# Altium PCB mpll31.PcbDoc (part 4 of 4)
Units mil, origin at the board's own origin, x right, y up, seen from the top; angles counter-clockwise.
Board outline 3925 x 3925 mil, 2 copper layers (TopLayer, BottomLayer); 92 components, 107 nets, 905 pads, 24 vias.
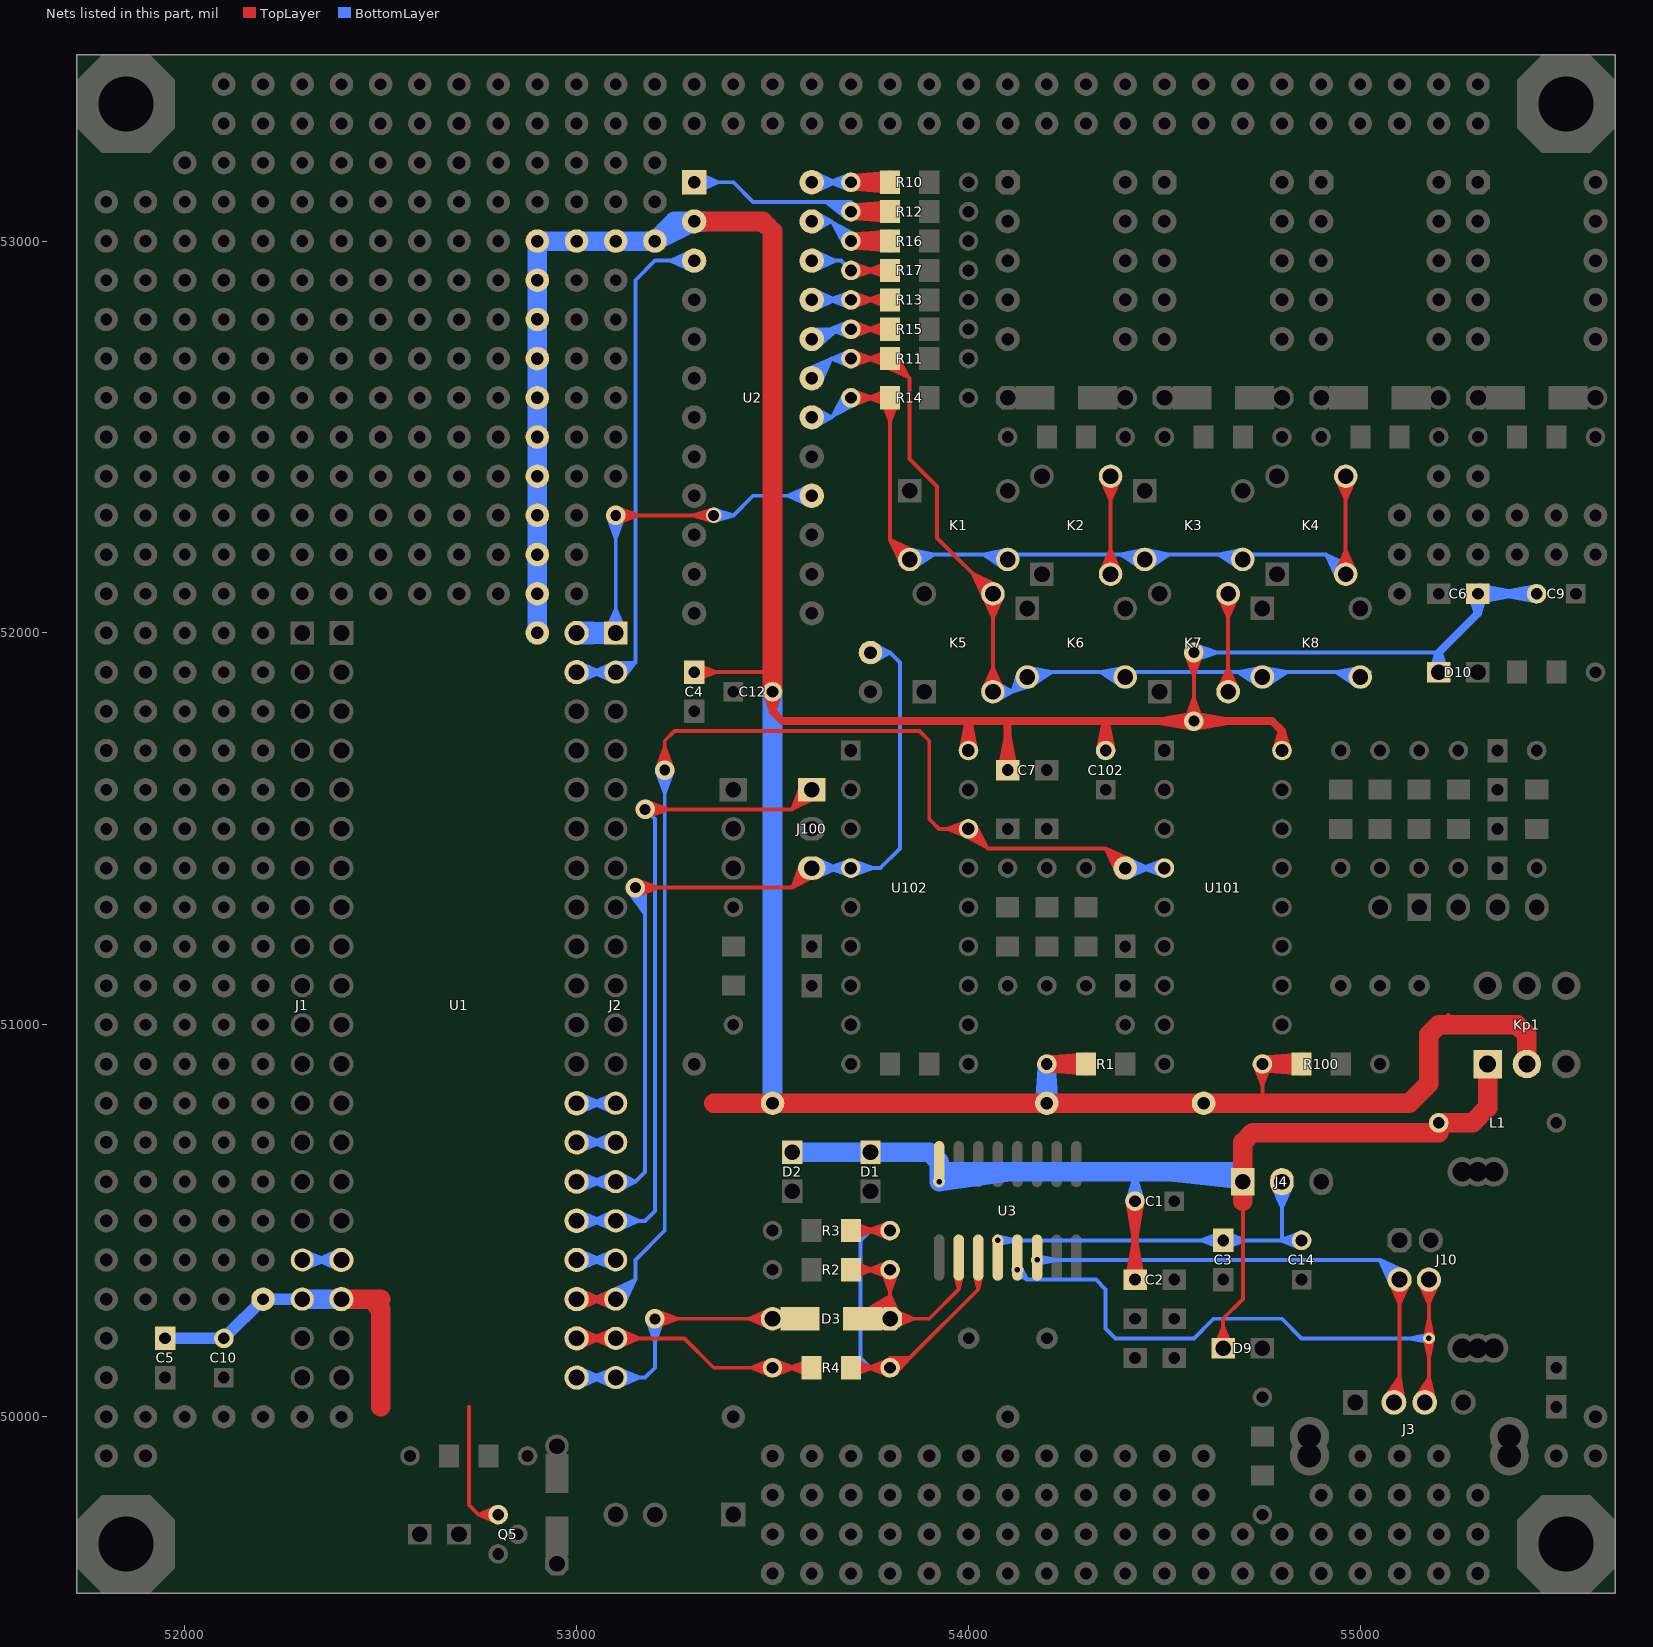
[diagram p4: the nets of this part, all layers, seen from the top]

## Via types
v1: diameter 50, hole 28, TopLayer to BottomLayer, 12 vias
v2: diameter 30, hole 14, TopLayer to BottomLayer, 8 vias
v3: diameter 40, hole 28, TopLayer to BottomLayer, 4 vias

## Nets (pads, with @x,y where several pads share a name; then routed paths per layer and width w, separated by ;. In a path a pad name is that pad's centre, name@x,y a point inside that pad or via, vN(x,y) a via of type N, cw(c..) or ccw(c..) an arc to the next point about the centre after c; other vN are vias at no path point) (continued)
P27: J2.2 U1.39 U2.3 | length 2530.7
  BottomLayer w10: U1.39@53000,51900 J2.2@53100,51900 53150,51925 ; U1.39@53000.3,51894.01 53061,51900 ; U1.39@53000.3,51905.99 53061,51900 ; U1.39@53002.1,51884.14 53061,51900 ; U1.39@53002.1,51915.86 53061,51900 ; U1.39@53005.54,51874.6 53061,51900 ; U1.39@53005.54,51925.4 53061,51900 ; J2.2@53094.11,51923.81 53150,51925 ; J2.2@53094.95,51876 53040.47,51900 ; J2.2@53094.95,51924 53040.47,51900 ; J2.2@53095.25,51913.73 53150,51925 ; J2.2@53098.23,51885.58 53040.47,51900 ; J2.2@53098.23,51914.42 53040.47,51900 ; J2.2@53108.13,51887.96 53150,51925 ; J2.2@53115.51,51881 53150,51925 ; J2.2@53125,51900 53150,51925 ; U2.3@53294.46,52924.6 53239,52950 ; U2.3@53294.46,52975.4 53239,52950 ; U2.3@53297.9,52934.14 53239,52950 ; U2.3@53297.9,52965.86 53239,52950 ; U2.3@53299.7,52944.01 53239,52950 ; U2.3@53299.7,52955.99 53239,52950 ; U2.3@53300,52950 53200,52950 53150,52900 53150,51925
P32: J2.18 pad.7@54400,51400 U1.23 U101.4 U102.14 | length 6470.6
  TopLayer w10: U1.23@53000,50300 J2.18@53100,50300 ; U1.23@53000.3,50294.01 53061,50300 ; U1.23@53000.3,50305.99 53061,50300 ; U1.23@53002.1,50284.14 53061,50300 ; U1.23@53002.1,50315.86 53061,50300 ; U1.23@53005.54,50274.6 53061,50300 ; U1.23@53005.54,50325.4 53061,50300 ; J2.18@53094.95,50276 53040.47,50300 ; J2.18@53094.95,50324 53040.47,50300 ; J2.18@53098.23,50285.58 53040.47,50300 ; J2.18@53098.23,50314.42 53040.47,50300 ; v1@53205.29,51653.39 53225,51709 ; v1@53215.04,51650.85 53225,51709 ; v1(53225,51650) 53225,51725 53250,51750 53875,51750 53900,51725 53900,51525 53925,51500 U102.14@54000,51500 54050,51450 54350,51450 ; v1@53234.96,51650.85 53225,51709 ; v1@53244.71,51653.39 53225,51709 ; U102.14@53988.19,51483.86 54046.21,51453.79 ; U102.14@53993.49,51492.41 54046.21,51453.79 ; U102.14@53996.36,51480.33 53945,51500 ; U102.14@53996.36,51519.67 53945,51500 ; U102.14@53999.09,51490.04 53945,51500 ; U102.14@53999.09,51509.96 53945,51500 ; U102.14@54007.59,51506.51 54046.21,51453.79 ; U102.14@54016.14,51511.81 54046.21,51453.79 ; pad.7@54379.48,51385.73 54350,51450 ; pad.7@54388.33,51390.58 54350,51450 ; pad.7@54400,51400 54350,51450 ; pad.7@54409.42,51411.67 54350,51450 ; pad.7@54414.27,51420.52 54350,51450
  BottomLayer w10: U1.23@53000,50300 J2.18@53100,50300 53150,50350 ; U1.23@53000.3,50294.01 53061,50300 ; U1.23@53000.3,50305.99 53061,50300 ; U1.23@53002.1,50284.14 53061,50300 ; U1.23@53002.1,50315.86 53061,50300 ; U1.23@53005.54,50274.6 53061,50300 ; U1.23@53005.54,50325.4 53061,50300 ; J2.18@53085.93,50320.09 53150,50350 ; J2.18@53090.84,50311.27 53150,50350 ; J2.18@53094.95,50276 53040.47,50300 ; J2.18@53094.95,50324 53040.47,50300 ; J2.18@53098.23,50285.58 53040.47,50300 ; J2.18@53098.23,50314.42 53040.47,50300 ; J2.18@53111.27,50290.84 53150,50350 ; J2.18@53120.09,50285.93 53150,50350 ; v1@53205.29,51646.61 53225,51591 ; v1@53215.04,51649.15 53225,51591 ; v1@53234.96,51649.15 53225,51591 ; v1@53244.71,51646.61 53225,51591 ; pad.7@54400,51400 U101.4@54500,51400 ; pad.7@54401.88,51385.12 54460,51400 ; pad.7@54401.88,51414.88 54460,51400 ; pad.7@54405.21,51375.55 54460,51400 ; pad.7@54405.21,51424.45 54460,51400 ; U101.4@54496.36,51380.33 54445,51400 ; U101.4@54496.36,51419.67 54445,51400 ; U101.4@54499.09,51390.04 54445,51400 ; U101.4@54499.09,51409.96 54445,51400 ; 53150,50350 53150,50400 53225,50475 v1(53225,51650) 53225,51591
P33: J2.17 U1.24 | length 704.1
  BottomLayer w10: U1.24@53000,50400 J2.17@53100,50400 ; U1.24@53000.3,50394.01 53061,50400 ; U1.24@53000.3,50405.99 53061,50400 ; U1.24@53002.1,50384.14 53061,50400 ; U1.24@53002.1,50415.86 53061,50400 ; U1.24@53005.54,50374.6 53061,50400 ; U1.24@53005.54,50425.4 53061,50400 ; J2.17@53094.95,50376 53040.47,50400 ; J2.17@53094.95,50424 53040.47,50400 ; J2.17@53098.23,50385.58 53040.47,50400 ; J2.17@53098.23,50414.42 53040.47,50400
P34: J2.16 J100.1 U1.25 | length 3106
  TopLayer w10: v1(53175,51550) 53550,51550 ; v1@53175.85,51540.04 53234,51550 ; v1@53175.85,51559.96 53234,51550 ; v1@53178.39,51530.29 53234,51550 ; v1@53178.39,51569.71 53234,51550 ; J100.1@53573.63,51612.98 53550,51550 ; J100.1@53582.8,51608.73 53550,51550 ; J100.1@53595,51600 53550,51550 ; J100.1@53600,51600 53550,51550 ; J100.1@53604.96,51588.79 53550,51550 ; J100.1@53610.15,51580.11 53550,51550
  BottomLayer w10: U1.25@53000,50500 J2.16@53100,50500 53175,50500 53200,50525 53200,51525 v1(53175,51550) ; U1.25@53000.3,50494.01 53061,50500 ; U1.25@53000.3,50505.99 53061,50500 ; U1.25@53002.1,50484.14 53061,50500 ; U1.25@53002.1,50515.86 53061,50500 ; U1.25@53005.54,50474.6 53061,50500 ; U1.25@53005.54,50525.4 53061,50500 ; J2.16@53094.95,50476 53040.47,50500 ; J2.16@53094.95,50524 53040.47,50500 ; J2.16@53098.23,50485.58 53040.47,50500 ; J2.16@53098.23,50514.42 53040.47,50500 ; J2.16@53101.77,50485.58 53159.53,50500 ; J2.16@53101.77,50514.42 53159.53,50500 ; J2.16@53105.05,50476 53159.53,50500 ; J2.16@53105.05,50524 53159.53,50500
P35: J2.15 J100.3 pad.5@53750,51950 U1.26 U102.4 | length 4864.2
  TopLayer w10: v1(53150,51350) 53550,51350 ; v1@53150.85,51340.04 53209,51350 ; v1@53150.85,51359.96 53209,51350 ; v1@53153.39,51330.29 53209,51350 ; v1@53153.39,51369.71 53209,51350 ; J100.3@53573.63,51412.98 53550,51350 ; J100.3@53582.8,51408.73 53550,51350 ; J100.3@53595,51400 53550,51350 ; J100.3@53600,51400 53550,51350 ; J100.3@53604.96,51388.79 53550,51350 ; J100.3@53610.15,51380.11 53550,51350
  BottomLayer w10: U1.26@53000,50600 J2.15@53100,50600 53150,50600 ; U1.26@53000.3,50594.01 53061,50600 ; U1.26@53000.3,50605.99 53061,50600 ; U1.26@53002.1,50584.14 53061,50600 ; U1.26@53002.1,50615.86 53061,50600 ; U1.26@53005.54,50574.6 53061,50600 ; U1.26@53005.54,50625.4 53061,50600 ; J2.15@53094.95,50576 53040.47,50600 ; J2.15@53094.95,50624 53040.47,50600 ; J2.15@53098.23,50585.58 53040.47,50600 ; J2.15@53098.23,50614.42 53040.47,50600 ; J2.15@53102.11,50585.63 53150,50600 ; J2.15@53102.11,50614.37 53150,50600 ; J2.15@53106.02,50576.22 53150,50600 ; J2.15@53106.02,50623.78 53150,50600 ; v1@53132.38,51340.53 53175,51282.36 ; v1@53140.88,51345.89 53175,51282.36 ; v1(53150,51350) 53175,51282.36 ; v1@53159.6,51352.81 53175,51282.36 ; v1@53169.54,51354.26 53175,51282.36 ; 53175,51350 53175,50625 53150,50600 ; J100.3@53600,51400 U102.4@53700,51400 53775,51400 53825,51450 53825,51925 53800,51950 ; J100.3@53605,51400 53665,51400 ; J100.3@53606.88,51385.12 53665,51400 ; J100.3@53606.88,51414.88 53665,51400 ; J100.3@53610.21,51375.55 53665,51400 ; J100.3@53610.21,51424.45 53665,51400 ; U102.4@53696.36,51380.33 53645,51400 ; U102.4@53696.36,51419.67 53645,51400 ; U102.4@53699.09,51390.04 53645,51400 ; U102.4@53699.09,51409.96 53645,51400 ; U102.4@53700.91,51390.04 53755,51400 ; U102.4@53700.91,51409.96 53755,51400 ; U102.4@53703.64,51380.33 53755,51400 ; U102.4@53703.64,51419.67 53755,51400 ; pad.5@53750,51950 53800,51950 ; pad.5@53752.25,51935.17 53800,51950 ; pad.5@53752.25,51964.83 53800,51950 ; pad.5@53756.25,51925.79 53800,51950 ; pad.5@53756.25,51974.21 53800,51950
P36: J2.14 U1.27 | length 704.1
  BottomLayer w10: U1.27@53000,50700 J2.14@53100,50700 ; U1.27@53000.3,50694.01 53061,50700 ; U1.27@53000.3,50705.99 53061,50700 ; U1.27@53002.1,50684.14 53061,50700 ; U1.27@53002.1,50715.86 53061,50700 ; U1.27@53005.54,50674.6 53061,50700 ; U1.27@53005.54,50725.4 53061,50700 ; J2.14@53094.95,50676 53040.47,50700 ; J2.14@53094.95,50724 53040.47,50700 ; J2.14@53098.23,50685.58 53040.47,50700 ; J2.14@53098.23,50714.42 53040.47,50700
P37: J2.13 U1.28 | length 704.1
  BottomLayer w10: U1.28@53000,50800 J2.13@53100,50800 ; U1.28@53000.3,50794.01 53061,50800 ; U1.28@53000.3,50805.99 53061,50800 ; U1.28@53002.1,50784.14 53061,50800 ; U1.28@53002.1,50815.86 53061,50800 ; U1.28@53005.54,50774.6 53061,50800 ; U1.28@53005.54,50825.4 53061,50800 ; J2.13@53094.95,50776 53040.47,50800 ; J2.13@53094.95,50824 53040.47,50800 ; J2.13@53098.23,50785.58 53040.47,50800 ; J2.13@53098.23,50814.42 53040.47,50800
P45: J2.1 U1.40 U2.16 | length 3170
  TopLayer w10: v1(53100,52300) v3(53350,52300) 53296,52300 ; v1@53100.85,52290.04 53159,52300 ; v1@53100.85,52309.96 53159,52300 ; v1@53103.39,52280.29 53159,52300 ; v1@53103.39,52319.71 53159,52300 ; v3@53347.92,52285.15 53296,52300 ; v3@53347.92,52314.85 53296,52300
  BottomLayer w10: J2.1@53076,52005.05 53100,52059.53 ; v1@53080.29,52296.61 53100,52241 ; J2.1@53085.58,52001.77 53100,52059.53 ; v1@53090.04,52299.15 53100,52241 ; J2.1@53100,52000 v1(53100,52300) ; v1@53109.96,52299.15 53100,52241 ; J2.1@53114.42,52001.77 53100,52059.53 ; v1@53119.71,52296.61 53100,52241 ; J2.1@53124,52005.05 53100,52059.53 ; v3(53350,52300) 53400,52300 ; v3@53352.25,52285.17 53400,52300 ; v3@53352.25,52314.83 53400,52300 ; U2.16@53594.46,52324.6 53539,52350 ; U2.16@53594.46,52375.4 53539,52350 ; U2.16@53597.9,52334.14 53539,52350 ; U2.16@53597.9,52365.86 53539,52350 ; U2.16@53599.7,52344.01 53539,52350 ; U2.16@53599.7,52355.99 53539,52350 ; U2.16@53600,52350 53450,52350 53400,52300
  BottomLayer w20: U1.40@52998.34,51979.07 J2.1@53089.96,51982.35 ; U1.40@52998.34,52020.93 J2.1@53089.96,52017.65 ; U1.40@53002.42,51979.14 53091,52000 U1.40@53002.42,52020.86 ; U1.40@53006.38,51979.99 J2.1@53089.96,52017.65 ; U1.40@53006.38,52020.01 J2.1@53089.96,51982.35 ; J2.1@53097.87,51980.59 53010.47,52000 J2.1@53097.87,52019.41 ; J2.1@53100,52000 U1.40@53000,52000 ; U1.40@53000,52000 J2.1@53089.96,52017.65 ; U1.40@53000,52000 J2.1@53089.96,51982.35
P54: J1.17 U1.17 | length 704.1
  BottomLayer w10: J1.17@52300,50400 U1.17@52400,50400 ; J1.17@52301.77,50385.58 52359.53,50400 ; J1.17@52301.77,50414.42 52359.53,50400 ; J1.17@52305.05,50376 52359.53,50400 ; J1.17@52305.05,50424 52359.53,50400 ; U1.17@52394.46,50374.6 52339,50400 ; U1.17@52394.46,50425.4 52339,50400 ; U1.17@52397.9,50384.14 52339,50400 ; U1.17@52397.9,50415.86 52339,50400 ; U1.17@52399.7,50394.01 52339,50400 ; U1.17@52399.7,50405.99 52339,50400
RX: D3.1 D3.3 R2.1 R2.3 U3.2 | length 3697.2
  TopLayer w10: R2.3@53700,50375 R2.1@53800,50375 D3.1@53800,50250 ; R2.3@53701.01,50364.46 53755.59,50375 ; R2.3@53701.01,50385.54 53755.59,50375 ; R2.3@53703.81,50354.77 53755.59,50375 ; R2.3@53703.81,50395.23 53755.59,50375 ; D3.3@53730,50250 D3.1@53800,50250 ; D3.3@53734.6,50268.7 53798.67,50307.02 ; D3.3@53740.34,50260.41 53798.67,50307.02 ; D3.3@53744.18,50226.29 D3.1@53794.79,50225.55 ; D3.3@53744.18,50273.71 D3.1@53794.79,50274.45 ; D3.3@53745.35,50236.4 D3.1@53794.79,50225.55 ; D3.3@53745.35,50263.6 D3.1@53794.79,50274.45 ; D3.3@53748.21,50235.65 D3.1@53798.12,50235.12 ; D3.3@53748.21,50264.35 D3.1@53798.12,50264.88 ; D3.3@53749.14,50225.51 D3.1@53798.12,50235.12 ; D3.3@53749.14,50274.49 D3.1@53798.12,50264.88 ; D3.3@53752.6,50235.63 D3.1@53800,50250 ; D3.3@53752.6,50264.37 D3.1@53800,50250 ; D3.3@53756.55,50226.24 D3.1@53800,50250 ; D3.3@53756.55,50273.76 D3.1@53800,50250 ; D3.3@53756.77,50236.91 D3.1@53798.12,50264.88 ; D3.3@53756.77,50263.09 D3.1@53798.12,50235.12 ; D3.3@53759.24,50238.42 D3.1@53794.79,50274.45 ; D3.3@53759.24,50261.58 D3.1@53794.79,50225.55 ; D3.3@53762.43,50241.75 53798.67,50307.02 ; D3.3@53763.31,50229.1 D3.1@53798.12,50264.88 ; D3.3@53763.31,50270.9 D3.1@53798.12,50235.12 ; D3.3@53767.17,50232.03 D3.1@53794.79,50274.45 ; D3.3@53767.17,50267.97 D3.1@53794.79,50225.55 ; D3.1@53771.55,50237.46 53798.67,50307.02 ; D3.1@53775.55,50255.21 53800,50310 ; R2.1@53780.33,50371.36 53800,50320 ; D3.1@53785.12,50251.88 53800,50310 ; R2.1@53790.04,50374.09 53800,50320 ; R2.1@53796.36,50355.33 53745,50375 ; R2.1@53796.36,50394.67 53745,50375 ; R2.1@53799.09,50365.04 53745,50375 ; R2.1@53799.09,50384.96 53745,50375 ; D3.1@53801.88,50235.12 53860,50250 ; D3.1@53801.88,50264.88 53860,50250 ; D3.1@53805.21,50225.55 53860,50250 ; D3.1@53805.21,50274.45 53860,50250 ; R2.1@53809.96,50374.09 53800,50320 ; D3.1@53814.88,50251.88 53800,50310 ; R2.1@53819.67,50371.36 53800,50320 ; D3.1@53824.45,50255.21 53800,50310 ; U3.2@53966.56,50359.48 53975,50325 ; U3.2@53975,50360.5 53975,50325 ; U3.2@53975,50406 53975,50325 ; U3.2@53983.44,50359.48 53975,50325 ; D3.3@53740,50250 D3.1@53798.12,50264.88 ; D3.3@53740,50250 D3.1@53798.12,50235.12 ; D3.3@53740,50250 D3.1@53794.79,50274.45 ; D3.3@53740,50250 D3.1@53794.79,50225.55 ; D3.3@53750.47,50250 D3.1@53798.12,50235.12 ; D3.3@53750.47,50250 D3.1@53798.12,50264.88 ; D3.3@53750.47,50250 D3.1@53800,50250 ; D3.3@53750.47,50250 D3.1@53794.79,50225.55 ; D3.3@53750.47,50250 D3.1@53794.79,50274.45 ; D3.3@53750.47,50250 53798.67,50307.02 ; D3.1@53800,50250 53900,50250 53975,50325
RXD: D3.2 D3.4 J2.20 U1.21 | length 2189.6
  TopLayer w10: v1(53200,50250) D3.2@53500,50250 ; v1@53200.85,50240.04 53259,50250 ; v1@53200.85,50259.96 53259,50250 ; v1@53203.39,50230.29 53259,50250 ; v1@53203.39,50269.71 53259,50250 ; D3.2@53494.79,50225.55 53440,50250 ; D3.2@53494.79,50274.45 53440,50250 ; D3.2@53498.12,50235.12 53440,50250 ; D3.2@53498.12,50264.88 53440,50250
  BottomLayer w10: U1.21@53000,50100 J2.20@53100,50100 53175,50100 53200,50125 v1(53200,50250) ; U1.21@53000.3,50094.01 53061,50100 ; U1.21@53000.3,50105.99 53061,50100 ; U1.21@53002.1,50084.14 53061,50100 ; U1.21@53002.1,50115.86 53061,50100 ; U1.21@53005.54,50074.6 53061,50100 ; U1.21@53005.54,50125.4 53061,50100 ; J2.20@53094.95,50076 53040.47,50100 ; J2.20@53094.95,50124 53040.47,50100 ; J2.20@53098.23,50085.58 53040.47,50100 ; J2.20@53098.23,50114.42 53040.47,50100 ; J2.20@53101.77,50085.58 53159.53,50100 ; J2.20@53101.77,50114.42 53159.53,50100 ; J2.20@53105.05,50076 53159.53,50100 ; J2.20@53105.05,50124 53159.53,50100 ; v1@53180.29,50246.61 53200,50191 ; v1@53190.04,50249.15 53200,50191 ; v1@53209.96,50249.15 53200,50191 ; v1@53219.71,50246.61 53200,50191
SEG0: K1.2 K1.3 K2.2 K2.3 K3.2 K3.3 K4.2 K4.3 R14.1 R14.3 U2.18 | length 7031.4
  TopLayer w10: R14.1@53700,52600 53775,52600 53800,52575 53800,52237.5 ; R14.1@53700.91,52590.04 53755,52600 ; R14.1@53700.91,52609.96 53755,52600 ; R14.1@53703.64,52580.33 53755,52600 ; R14.1@53703.64,52619.67 53755,52600 ; R14.3@53779.77,52592.25 53800,52540.47 ; R14.3@53789.46,52595.05 53800,52540.47 ; R14.3@53796.19,52579.77 53744.41,52600 ; R14.3@53796.19,52620.23 53744.41,52600 ; R14.3@53798.99,52589.46 53744.41,52600 ; R14.3@53798.99,52610.54 53744.41,52600 ; R14.3@53800,52596.06 53800,52540.47 ; R14.3@53800,52600 53744.41,52600 ; R14.3@53810.54,52595.05 53800,52540.47 ; R14.3@53820.23,52592.25 53800,52540.47 ; K1.2@53829.48,52173.23 53800,52237.5 ; K1.2@53838.33,52178.08 53800,52237.5 ; K1.2@53850,52187.5 53800,52237.5 ; K1.2@53859.42,52199.17 53800,52237.5 ; K1.2@53864.27,52208.02 53800,52237.5 ; K2.2@54338.05,52155.21 54362.5,52210 ; K2.3@54338.05,52394.79 54362.5,52340 ; K2.2@54347.62,52151.88 54362.5,52210 ; K2.3@54347.62,52398.12 54362.5,52340 ; K2.2@54362.5,52150 K2.3@54362.5,52400 ; K2.2@54377.38,52151.88 54362.5,52210 ; K2.3@54377.38,52398.12 54362.5,52340 ; K2.2@54386.95,52155.21 54362.5,52210 ; K2.3@54386.95,52394.79 54362.5,52340 ; K4.2@54938.05,52155.21 54962.5,52210 ; K4.3@54938.05,52394.79 54962.5,52340 ; K4.2@54947.62,52151.88 54962.5,52210 ; K4.3@54947.62,52398.12 54962.5,52340 ; K4.2@54962.5,52150 K4.3@54962.5,52400 ; K4.2@54977.38,52151.88 54962.5,52210 ; K4.3@54977.38,52398.12 54962.5,52340 ; K4.2@54986.95,52155.21 54962.5,52210 ; K4.3@54986.95,52394.79 54962.5,52340
  BottomLayer w10: U2.18@53600,52550 53650,52550 ; U2.18@53600.36,52544.01 53650,52550 ; U2.18@53600.36,52555.99 53650,52550 ; U2.18@53602.56,52534.21 53650,52550 ; U2.18@53602.56,52565.79 53650,52550 ; U2.18@53606.76,52524.89 53650,52550 ; U2.18@53606.76,52575.11 53650,52550 ; R14.1@53683.86,52611.81 53653.79,52553.79 ; R14.1@53692.41,52606.51 53653.79,52553.79 ; R14.1@53706.51,52592.41 53653.79,52553.79 ; R14.1@53711.81,52583.86 53653.79,52553.79 ; K1.2@53848.8,52202.45 53912.19,52200 ; K1.2@53850,52187.5 53912.19,52200 ; K1.2@53850,52200 54300,52200 54700,52200 54900,52200 54912.5,52200 ; K1.2@53850,52212.5 53912.19,52200 ; K1.2@53854.67,52173.25 53912.19,52200 ; K1.2@53859.66,52164.44 53912.19,52200 ; K1.3@54090.31,52164.46 54038.05,52200 ; K1.3@54095.31,52173.25 54038.05,52200 ; K1.3@54100,52187.5 54038.05,52200 ; K1.3@54100,52212.5 54038.05,52200 ; K1.3@54101.2,52202.45 54038.05,52200 ; K2.2@54338.29,52156.25 54362.5,52200 ; K2.2@54347.67,52152.25 54362.5,52200 ; K2.2@54362.5,52150 54362.5,52200 ; K2.2@54377.33,52152.25 54362.5,52200 ; K2.2@54386.71,52156.25 54362.5,52200 ; K3.2@54440.26,52164.48 54388.38,52200 ; K3.2@54445.29,52173.26 54388.38,52200 ; K3.2@54448.8,52202.45 54511.95,52200 ; K3.2@54451.21,52202.45 54388.38,52200 ; K3.2@54454.69,52173.25 54511.95,52200 ; K3.2@54459.69,52164.46 54511.95,52200 ; K3.3@54690.33,52164.44 54637.85,52200 ; K3.3@54695.32,52173.25 54637.85,52200 ; K3.3@54700,52187.5 54637.85,52200 ; K3.3@54700,52212.5 54637.85,52200 ; K3.3@54701.2,52202.45 54637.85,52200 ; K4.2@54941.98,52135.73 54912.5,52200 ; K4.2@54950.83,52140.58 54912.5,52200 ; K4.2@54962.5,52150 54912.5,52200 ; K4.2@54971.92,52161.67 54912.5,52200 ; K4.2@54976.77,52170.52 54912.5,52200 ; 53650,52550 R14.1@53700,52600 53653.79,52553.79 ; 54388.38,52200 K3.2@54450,52187.5 54511.95,52200 ; 54388.38,52200 54450,52212.5 54511.95,52200
SEG1: K5.2 K5.3 K6.2 K6.3 K7.2 K7.3 K8.2 K8.3 R11.1 R11.3 U2.19 | length 7428.1
  TopLayer w10: R11.1@53700,52700 R11.3@53800,52700 53850,52650 53850,52443.71 53920,52373.71 53920,52242.5 K5.3@54062.5,52100 ; R11.1@53700.91,52690.04 53755,52700 ; R11.1@53700.91,52709.96 53755,52700 ; R11.1@53703.64,52680.33 53755,52700 ; R11.1@53703.64,52719.67 53755,52700 ; R11.3@53788.74,52678.82 53846.8,52653.2 ; R11.3@53793.52,52687.68 53846.8,52653.2 ; R11.3@53796.19,52679.77 53744.41,52700 ; R11.3@53796.19,52720.23 53744.41,52700 ; R11.3@53798.99,52689.46 53744.41,52700 ; R11.3@53798.99,52710.54 53744.41,52700 ; R11.3@53800,52696.06 53846.8,52653.2 ; R11.3@53807.78,52703.25 53846.8,52653.2 ; R11.3@53816.19,52708.79 53846.8,52653.2 ; K5.2@54038.05,51855.21 54062.5,51910 ; K5.3@54038.05,52094.79 54062.5,52040 ; K5.3@54042.04,52085.64 54011.29,52151.21 ; K5.2@54047.62,51851.88 54062.5,51910 ; K5.3@54047.62,52098.12 54062.5,52040 ; K5.3@54050.85,52090.55 54011.29,52151.21 ; K5.2@54062.5,51850 K5.3@54062.5,52100 ; K5.3@54071.95,52111.65 54011.29,52151.21 ; K5.3@54076.86,52120.46 54011.29,52151.21 ; K5.2@54077.38,51851.88 54062.5,51910 ; K5.3@54077.38,52098.12 54062.5,52040 ; K5.2@54086.95,51855.21 54062.5,51910 ; K5.3@54086.95,52094.79 54062.5,52040 ; K7.2@54638.05,51855.21 54662.5,51910 ; K7.3@54638.05,52094.79 54662.5,52040 ; K7.2@54647.62,51851.88 54662.5,51910 ; K7.3@54647.62,52098.12 54662.5,52040 ; K7.2@54662.5,51850 K7.3@54662.5,52100 ; K7.2@54677.38,51851.88 54662.5,51910 ; K7.3@54677.38,52098.12 54662.5,52040 ; K7.2@54686.95,51855.21 54662.5,51910 ; K7.3@54686.95,52094.79 54662.5,52040 ; 54011.29,52151.21 K5.3@54062.5,52100
  BottomLayer w10: U2.19@53585.31,52671.45 53650,52700 ; U2.19@53590.04,52662.52 53650,52700 ; U2.19@53595.94,52654.42 53650,52700 ; U2.19@53600,52650 53650,52700 ; U2.19@53604.42,52645.94 53650,52700 ; U2.19@53612.52,52640.04 53650,52700 ; U2.19@53621.45,52635.31 53650,52700 ; R11.1@53696,52680.4 53650,52700 ; R11.1@53696,52719.6 53650,52700 ; R11.1@53699,52690.05 53650,52700 ; R11.1@53699,52709.95 53650,52700 ; K5.2@54062.5,51862.5 K5.2@54062.5,51850 54112.5,51850 ; K5.2@54064.75,51835.17 54112.5,51850 ; K5.2@54064.75,51864.83 54112.5,51850 ; K5.2@54068.75,51825.79 54112.5,51850 ; K5.2@54068.75,51874.21 54112.5,51850 ; K6.2@54128.65,51900.51 54112.5,51850 ; K6.2@54137.5,51900 K6.2@54150,51887.5 ; K6.2@54138,51896.5 54112.5,51850 ; K6.2@54148.8,51902.45 54211.95,51900 ; K6.2@54150,51900 54400,51900 54650,51900 54662.5,51900 ; K6.2@54150,51912.5 54211.95,51900 ; K6.2@54154.69,51873.25 54211.95,51900 ; K6.2@54159,51875.5 54112.5,51850 ; K6.2@54159.69,51864.46 54211.95,51900 ; K6.2@54163.01,51866.15 54112.5,51850 ; K6.3@54390.31,51864.46 54338.05,51900 ; K6.3@54395.31,51873.25 54338.05,51900 ; K6.3@54400,51887.5 54338.05,51900 ; K6.3@54400,51912.5 54338.05,51900 ; K6.3@54401.2,51902.45 54338.05,51900 ; K7.2@54638.29,51856.25 54662.5,51900 ; K7.2@54647.67,51852.25 54662.5,51900 ; K7.2@54662.5,51850 54662.5,51900 ; K7.2@54677.33,51852.25 54662.5,51900 ; K7.2@54686.71,51856.25 54662.5,51900 ; K8.2@54740.18,51864.51 54688.9,51900 ; K8.2@54745.25,51873.27 54688.9,51900 ; K8.2@54748.8,51902.45 54812,51900 ; K8.2@54751.22,51902.45 54688.9,51900 ; K8.2@54754.69,51873.25 54812,51900 ; K8.2@54759.69,51864.45 54812,51900 ; K8.3@54990.19,51864.5 54938.83,51900 ; K8.3@54995.25,51873.27 54938.83,51900 ; K8.3@55000,51887.5 54938.83,51900 ; K8.3@55000,51912.5 54938.83,51900 ; K8.3@55001.22,51902.45 54938.83,51900 ; K8.3@55025,51900 54662.5,51900 ; 53650,52700 R11.1@53700,52700 53650,52700 ; 54112.5,51850 K6.2@54150,51887.5 ; K6.2@54150,51887.5 54211.95,51900 ; 54688.9,51900 K8.2@54750,51887.5 54812,51900 ; 54688.9,51900 54750,51912.5 54812,51900
SEG2: R15.1 R15.3 U2.20 | length 1388.3
  TopLayer w10: R15.1@53700,52775 R15.3@53800,52775 ; R15.1@53700.91,52765.04 53755,52775 ; R15.1@53700.91,52784.96 53755,52775 ; R15.1@53703.64,52755.33 53755,52775 ; R15.1@53703.64,52794.67 53755,52775 ; R15.3@53796.19,52754.77 53744.41,52775 ; R15.3@53796.19,52795.23 53744.41,52775 ; R15.3@53798.99,52764.46 53744.41,52775 ; R15.3@53798.99,52785.54 53744.41,52775
  BottomLayer w10: U2.20@53595.39,52775.59 53665.48,52775 ; U2.20@53596.04,52765.5 53665.48,52775 ; U2.20@53598.1,52755.69 53665.48,52775 ; U2.20@53600,52775 R15.1@53700,52775 ; U2.20@53602.38,52744.49 53665.48,52775 ; U2.20@53607.38,52735.8 53665.48,52775 ; U2.20@53613.62,52727.85 53665.48,52775 ; 53625,52775 U2.20@53600,52750 53665.48,52775 ; R15.1@53696.36,52755.33 53645,52775 ; R15.1@53696.36,52794.67 53645,52775 ; R15.1@53699.09,52765.04 53645,52775 ; R15.1@53699.09,52784.96 53645,52775
SEG3: R13.1 R13.3 U2.21 | length 1228.4
  TopLayer w10: R13.1@53700,52850 R13.3@53800,52850 ; R13.1@53700.91,52840.04 53755,52850 ; R13.1@53700.91,52859.96 53755,52850 ; R13.1@53703.64,52830.33 53755,52850 ; R13.1@53703.64,52869.67 53755,52850 ; R13.3@53796.19,52829.77 53744.41,52850 ; R13.3@53796.19,52870.23 53744.41,52850 ; R13.3@53798.99,52839.46 53744.41,52850 ; R13.3@53798.99,52860.54 53744.41,52850
  BottomLayer w10: U2.21@53600,52850 R13.1@53700,52850 ; U2.21@53600.3,52844.01 53661,52850 ; U2.21@53600.3,52855.99 53661,52850 ; U2.21@53602.1,52834.14 53661,52850 ; U2.21@53602.1,52865.86 53661,52850 ; U2.21@53605.54,52824.6 53661,52850 ; U2.21@53605.54,52875.4 53661,52850 ; R13.1@53696.36,52830.33 53645,52850 ; R13.1@53696.36,52869.67 53645,52850 ; R13.1@53699.09,52840.04 53645,52850 ; R13.1@53699.09,52859.96 53645,52850
SEG4: R17.1 R17.3 U2.22 | length 1018.7
  TopLayer w10: R17.1@53700,52925 R17.3@53800,52925 ; R17.1@53700.91,52915.04 53755,52925 ; R17.1@53700.91,52934.96 53755,52925 ; R17.1@53703.64,52905.33 53755,52925 ; R17.1@53703.64,52944.67 53755,52925 ; R17.3@53796.19,52904.77 53744.41,52925 ; R17.3@53796.19,52945.23 53744.41,52925 ; R17.3@53798.99,52914.46 53744.41,52925 ; R17.3@53798.99,52935.54 53744.41,52925
  BottomLayer w10: U2.22@53600,52950 53675,52950 R17.1@53700,52925 ; U2.22@53600.3,52944.01 53661,52950 ; U2.22@53600.3,52955.99 53661,52950 ; U2.22@53602.1,52934.14 53661,52950 ; U2.22@53602.1,52965.86 53661,52950 ; U2.22@53605.54,52924.6 53661,52950 ; U2.22@53605.54,52975.4 53661,52950
SEG5: R16.1 R16.3 U2.23 | length 1702.3
  TopLayer w20: R16.1@53700,53000 R16.3@53800,53000 ; R16.1@53701.32,52985.06 53785,53000 R16.1@53701.32,53014.94 ; R16.3@53797.03,52988.63 R16.1@53714.83,53012.53 ; R16.3@53797.03,53011.37 R16.1@53714.83,52987.47 ; R16.3@53798.58,52984.47 53714.41,53000 R16.3@53798.58,53015.53 ; R16.3@53800,52996.06 R16.1@53714.83,52987.47 ; R16.3@53800,53003.94 R16.1@53714.83,53012.53 ; R16.3@53800.15,52980.47 R16.1@53714.83,52987.47 ; R16.3@53800.15,53019.53 R16.1@53714.83,53012.53
  BottomLayer w10: U2.23@53600,53050 53650,53050 ; U2.23@53600.36,53044.01 53650,53050 ; U2.23@53600.36,53055.99 53650,53050 ; U2.23@53602.56,53034.21 53650,53050 ; U2.23@53602.56,53065.79 53650,53050 ; U2.23@53606.76,53024.89 53650,53050 ; U2.23@53606.76,53075.11 53650,53050 ; R16.1@53683.86,52988.19 53653.79,53046.21 ; R16.1@53692.41,52993.49 53653.79,53046.21 ; R16.1@53706.51,53007.59 53653.79,53046.21 ; R16.1@53711.81,53016.14 53653.79,53046.21 ; 53650,53050 R16.1@53700,53000 53653.79,53046.21
SEG6: R10.1 R10.3 U2.24 | length 1640.8
  TopLayer w20: R10.1@53700,53150 R10.3@53800,53150 ; R10.1@53701.32,53135.06 53785,53150 R10.1@53701.32,53164.94 ; R10.3@53797.03,53138.63 R10.1@53714.83,53162.53 ; R10.3@53797.03,53161.37 R10.1@53714.83,53137.47 ; R10.3@53798.58,53134.47 53714.41,53150 R10.3@53798.58,53165.53 ; R10.3@53800,53146.06 R10.1@53714.83,53137.47 ; R10.3@53800,53153.94 R10.1@53714.83,53162.53 ; R10.3@53800.15,53130.47 R10.1@53714.83,53137.47 ; R10.3@53800.15,53169.53 R10.1@53714.83,53162.53
  BottomLayer w10: U2.24@53600,53150 R10.1@53700,53150 ; U2.24@53600.3,53144.01 53661,53150 ; U2.24@53600.3,53155.99 53661,53150 ; U2.24@53602.1,53134.14 53661,53150 ; U2.24@53602.1,53165.86 53661,53150 ; U2.24@53605.54,53124.6 53661,53150 ; U2.24@53605.54,53175.4 53661,53150 ; R10.1@53696.36,53130.33 53645,53150 ; R10.1@53696.36,53169.67 53645,53150 ; R10.1@53699.09,53140.04 53645,53150 ; R10.1@53699.09,53159.96 53645,53150
SEG7: R12.1 R12.3 U2.1 | length 2083.3
  TopLayer w20: R12.1@53700,53075 R12.3@53800,53075 ; R12.1@53701.32,53060.06 53785,53075 R12.1@53701.32,53089.94 ; R12.3@53797.03,53063.63 R12.1@53714.83,53087.53 ; R12.3@53797.03,53086.37 R12.1@53714.83,53062.47 ; R12.3@53798.58,53059.47 53714.41,53075 R12.3@53798.58,53090.53 ; R12.3@53800,53071.06 R12.1@53714.83,53062.47 ; R12.3@53800,53078.94 R12.1@53714.83,53087.53 ; R12.3@53800.15,53055.47 R12.1@53714.83,53062.47 ; R12.3@53800.15,53094.53 R12.1@53714.83,53087.53
  BottomLayer w10: U2.1@53300,53150 53400,53150 53450,53100 53700,53100 ; U2.1@53300.3,53144.01 53361,53150 ; U2.1@53300.3,53155.99 53361,53150 ; U2.1@53302.1,53134.14 53361,53150 ; U2.1@53302.1,53165.86 53361,53150 ; U2.1@53305.54,53124.6 53361,53150 ; U2.1@53305.54,53175.4 53361,53150 ; R12.1@53690.04,53057.65 53636.37,53100 ; R12.1@53695.67,53065.98 53636.37,53100 ; R12.1@53700,53075 53636.37,53100 ; R12.1@53702.97,53084.55 53636.37,53100 ; R12.1@53704.51,53094.48 53636.37,53100
TX: R3.1 R3.3 R4.1 R4.3 U3.3 | length 2719.9
  TopLayer w10: R4.3@53700,50125 R4.1@53800,50125 53850,50150 ; R3.3@53700,50475 R3.1@53800,50475 ; R4.3@53701.01,50114.46 53755.59,50125 ; R4.3@53701.01,50135.54 53755.59,50125 ; R3.3@53701.01,50464.46 53755.59,50475 ; R3.3@53701.01,50485.54 53755.59,50475 ; R4.3@53703.81,50104.77 53755.59,50125 ; R4.3@53703.81,50145.23 53755.59,50125 ; R3.3@53703.81,50454.77 53755.59,50475 ; R3.3@53703.81,50495.23 53755.59,50475 ; R4.1@53794.4,50144.2 53850,50150 ; R4.1@53796.36,50105.33 53745,50125 ; R4.1@53796.35,50134.31 53850,50150 ; R4.1@53796.36,50144.67 53745,50125 ; R3.1@53796.36,50455.33 53745,50475 ; R3.1@53796.36,50494.67 53745,50475 ; R4.1@53799.09,50115.04 53745,50125 ; R4.1@53799.09,50134.96 53745,50125 ; R3.1@53799.09,50465.04 53745,50475 ; R3.1@53799.09,50484.96 53745,50475 ; 53800,50150 53850,50150 ; R4.1@53805.25,50116.49 53850,50150 ; R4.1@53812,50109 53850,50150 ; U3.3@54016.56,50359.48 54025,50325 ; U3.3@54025,50360.5 54025,50325 ; U3.3@54025,50406 54025,50325 ; U3.3@54033.44,50359.48 54025,50325 ; 53850,50150 54025,50325
  BottomLayer w10: R4.1@53796,50105.4 53750,50125 ; R4.1@53796,50144.6 53750,50125 ; R3.1@53796,50455.4 53750,50475 ; R3.1@53796,50494.6 53750,50475 ; R4.1@53799,50115.05 53750,50125 ; R4.1@53799,50134.95 53750,50125 ; R3.1@53799,50465.05 53750,50475 ; R3.1@53799,50484.95 53750,50475 ; R4.1@53800,50125 53750,50125 ; R3.1@53800,50475 53750,50475 ; 53750,50125 53725,50150 53725,50450 53750,50475
TXD: J2.19 R4.2 R4.4 U1.22 | length 2135.6
  TopLayer w10: U1.22@53000,50200 J2.19@53100,50200 53275,50200 53350,50125 R4.2@53500,50125 R4.4@53600,50125 ; U1.22@53000.3,50194.01 53061,50200 ; U1.22@53000.3,50205.99 53061,50200 ; U1.22@53002.1,50184.14 53061,50200 ; U1.22@53002.1,50215.86 53061,50200 ; U1.22@53005.54,50174.6 53061,50200 ; U1.22@53005.54,50225.4 53061,50200 ; J2.19@53094.95,50176 53040.47,50200 ; J2.19@53094.95,50224 53040.47,50200 ; J2.19@53098.23,50185.58 53040.47,50200 ; J2.19@53098.23,50214.42 53040.47,50200 ; J2.19@53101.77,50185.58 53159.53,50200 ; J2.19@53101.77,50214.42 53159.53,50200 ; J2.19@53105.05,50176 53159.53,50200 ; J2.19@53105.05,50224 53159.53,50200 ; R4.2@53496.36,50105.33 53445,50125 ; R4.2@53496.36,50144.67 53445,50125 ; R4.2@53499.09,50115.04 53445,50125 ; R4.2@53499.09,50134.96 53445,50125 ; R4.2@53500.91,50115.04 53555,50125 ; R4.2@53500.91,50134.96 53555,50125 ; R4.2@53503.64,50105.33 53555,50125 ; R4.2@53503.64,50144.67 53555,50125 ; R4.4@53596.19,50104.77 53544.41,50125 ; R4.4@53596.19,50145.23 53544.41,50125 ; R4.4@53598.99,50114.46 53544.41,50125 ; R4.4@53598.99,50135.54 53544.41,50125
UD+: J3.3 J10.3 U3.5 | length 2720.9
  TopLayer w10: J3.3@55139.76,50046.24 55175,50098.76 ; J3.3@55148.61,50041.29 55175,50098.76 ; J10.3@55149.6,50344.46 55175,50289 ; J3.3@55158.03,50037.84 55175,50098.76 ; J10.3@55159.14,50347.9 55175,50289 ; J3.3@55164.37,50036.42 55175,50098.76 ; v2@55165.05,50198.98 55175,50151 v2@55184.95,50198.98 ; v2@55165.05,50201.02 55175,50249 v2@55184.95,50201.02 ; J10.3@55169.01,50349.7 55175,50289 ; J3.3@55170.82,50035.66 55175,50098.76 ; J3.3@55175,50025 v2(55175,50200) J10.3@55175,50350 ; J3.3@55180.85,50035.79 55175,50098.76 ; J10.3@55180.99,50349.7 55175,50289 ; J3.3@55190.84,50037.53 55175,50098.76 ; J10.3@55190.86,50347.9 55175,50289 ; J10.3@55200.4,50344.46 55175,50289
  BottomLayer w10: v2@54119,50367 54150,50350 ; v2(54125,50375) 54150,50350 ; v2@54133,50381 54150,50350 ; v2@55173.98,50190.05 55126,50200 v2@55173.98,50209.95 ; v2(55175,50200) 54850,50200 54800,50250 54625,50250 54575,50200 54375,50200 54350,50225 54350,50325 54325,50350 54150,50350
UD-: J3.2 J10.2 U3.6 | length 2675.5
  TopLayer w10: J3.2@55061.36,50047.05 55100,50102.24 ; J3.2@55070.07,50041.88 55100,50102.24 ; J10.2@55074.6,50344.46 55100,50289 ; J3.2@55079.36,50038.11 55100,50102.24 ; J10.2@55084.14,50347.9 55100,50289 ; J3.2@55085.63,50036.42 55100,50102.24 ; J3.2@55092.04,50035.34 55100,50102.24 ; J10.2@55094.01,50349.7 55100,50289 ; J3.2@55100,50050.79 J10.2@55100,50350 ; J3.2@55102.06,50034.9 55100,50102.24 ; J10.2@55105.99,50349.7 55100,50289 ; J3.2@55112.12,50035.97 55100,50102.24 ; J10.2@55115.86,50347.9 55100,50289 ; J10.2@55125.4,50344.46 55100,50289
  BottomLayer w10: v2(54175,50400) 55050,50400 ; v2@54176.02,50390.05 54224,50400 v2@54176.02,50409.95 ; J10.2@55078.55,50335.31 55050,50400 ; J10.2@55087.48,50340.04 55050,50400 ; J10.2@55095.58,50345.94 55050,50400 ; J10.2@55104.06,50354.42 55050,50400 ; J10.2@55109.96,50362.52 55050,50400 ; J10.2@55114.69,50371.45 55050,50400 ; 55050,50400 J10.2@55100,50350 55050,50400
V33: C3.1 C14.2 J4.2 U3.4 | length 1991
  BottomLayer w10: v2(54075,50450) C14.2@54850,50450 ; v2@54076.02,50440.05 54124,50450 v2@54076.02,50459.95 ; C3.1@54646.06,50429.37 54594,50450 ; C3.1@54646.06,50470.63 54594,50450 ; C3.1@54648.92,50439.05 54594,50450 ; C3.1@54648.92,50460.95 54594,50450 ; C3.1@54651.08,50439.05 54706,50450 ; C3.1@54651.08,50460.95 54706,50450 ; C3.1@54653.94,50429.37 54706,50450 ; C3.1@54653.94,50470.63 54706,50450 ; J4.2@54775.55,50589.79 54800,50535 ; J4.2@54785.12,50593.12 54800,50535 ; 54800,50450 J4.2@54800,50600 ; J4.2@54800,50595 54800,50535 ; J4.2@54814.88,50593.12 54800,50535 ; J4.2@54824.45,50589.79 54800,50535 ; C14.2@54846.36,50430.33 54795,50450 ; C14.2@54846.36,50469.67 54795,50450 ; C14.2@54849.09,50440.04 54795,50450 ; C14.2@54849.09,50459.96 54795,50450
VCC: C4.1 C5.1 C6.1 C7.1 C9.2 C10.2 C12.2 C102.2 D10.1 J1.18 Kp1.2 pad.0@52900,52000 pad.0@53200,53000 pad.0@54200,50800 pad.4@53100,53000 pad.5@53000,53000 pad.7@52900,53000 pad.8@52900,52900 pad.9@52200,50300 pad.9@52900,52800 pad.10@52900,52700 pad.11@52900,52600 pad.12@52900,52500 pad.13@52900,52400 pad.14@52900,52300 pad.15@52900,52200 pad.16@52900,52100 pad.31@54600,50800 pad.32@53500,50800 Q5.1 R1.1 R1.3 R100.2 R100.4 U1.18 U2.2 U101.16 U102.16 | length 17304.2
  TopLayer w10: 52725,50025 52725,49775 52750,49750 ; Q5.1@52796,49730.4 52750,49750 ; Q5.1@52796,49769.6 52750,49750 ; Q5.1@52799,49740.05 52750,49750 ; Q5.1@52799,49759.95 52750,49750 ; Q5.1@52800,49750 52750,49750 ; C4.1@53300,51900 53500,51900 ; C4.1@53301.08,51889.05 53356,51900 ; C4.1@53301.08,51910.95 53356,51900 ; C4.1@53303.94,51879.37 53356,51900 ; C4.1@53303.94,51920.63 53356,51900 ; v1@54555.29,51778.39 54575,51834 ; v1@54555.29,51946.61 54575,51891 ; v1@54565.04,51775.85 54575,51834 ; v1@54565.04,51949.15 54575,51891 ; v1(54575,51775) v1(54575,51950) ; v1@54584.96,51775.85 54575,51834 ; v1@54584.96,51949.15 54575,51891 ; v1@54594.71,51778.39 54575,51834 ; v1@54594.71,51946.61 54575,51891 ; R100.2@54730.33,50896.36 54750,50845 ; R100.2@54740.04,50899.09 54750,50845 ; 54750,50800 R100.2@54750,50900 ; R100.2@54759.96,50899.09 54750,50845 ; R100.2@54769.67,50896.36 54750,50845 ; 55200,51000 55225,51025
  TopLayer w20: C12.2@53485.17,51847.75 53500,51800 ; C12.2@53500,51850 53500,51800 ; C12.2@53514.83,51847.75 53500,51800 ; U102.16@53985.08,51701.5 54000,51775 ; U102.16@54000,51700 54000,51775 ; U102.16@54014.92,51701.5 54000,51775 ; C7.1@54084.07,51651.49 54100,51736 C7.1@54115.93,51651.49 ; C7.1@54100,51650 54100,51775 ; R1.1@54200,50900 R1.3@54300,50900 ; R1.1@54201.32,50885.06 54285,50900 R1.1@54201.32,50914.94 ; R1.3@54297.03,50888.63 R1.1@54214.83,50912.53 ; R1.3@54297.03,50911.37 R1.1@54214.83,50887.47 ; R1.3@54298.58,50884.47 54214.41,50900 R1.3@54298.58,50915.53 ; R1.3@54300,50896.06 R1.1@54214.83,50887.47 ; R1.3@54300,50903.94 R1.1@54214.83,50912.53 ; R1.3@54300.15,50880.47 R1.1@54214.83,50887.47 ; R1.3@54300.15,50919.53 R1.1@54214.83,50912.53 ; C102.2@54335.08,51701.5 54350,51775 ; C102.2@54350,51700 54350,51775 ; C102.2@54364.92,51701.5 54350,51775 ; v1@54573.74,51760.05 54486,51775 v1@54573.74,51789.95 ; v1@54576.26,51760.05 54664,51775 v1@54576.26,51789.95 ; R100.2@54750,50900 R100.4@54850,50900 ; R100.2@54751.32,50885.06 54835,50900 R100.2@54751.32,50914.94 ; U101.16@54785.17,51702.25 54800,51750 ; U101.16@54800,51700 54800,51750 ; U101.16@54814.83,51702.25 54800,51750 ; R100.4@54847.03,50888.63 R100.2@54764.83,50912.53 ; R100.4@54847.03,50911.37 R100.2@54764.83,50887.47 ; R100.4@54848.58,50884.47 54764.41,50900 R100.4@54848.58,50915.53 ; R100.4@54850,50896.06 R100.2@54764.83,50887.47 ; R100.4@54850,50903.94 R100.2@54764.83,50912.53 ; R100.4@54850.15,50880.47 R100.2@54764.83,50887.47 ; R100.4@54850.15,50919.53 R100.2@54764.83,50912.53 ; 53500,51800 53525,51775 54000,51775 ; 54000,51775 54150,51775 54350,51775 ; 54350,51775 v1(54575,51775) 54775,51775 54800,51750
  TopLayer w50: U1.18@52400,50300 52475,50300 ; 52500,50025 52500,50275 52475,50300 ; 52500,50300 52475,50300 ; U2.2@53300,53050 53475,53050 53487.5,53037.5 ; 53350,50800 pad.32@53500,50800 53575,50800 pad.0@54200,50800 54300,50800 pad.31@54600,50800 54750,50800 55125,50800 55175,50850 55175,50975 55200,51000 55400,51000 55425,50975 ; C12.2@53500,51850 53500,51900 53500,53025 ; Kp1.2@55424.76,50900 55425,50900.24 55425,50975 ; Kp1.2@55425,50900 55425,50975
  BottomLayer w10: v1(54575,51950) 55200,51950 ; v1@54575.85,51940.04 54634,51950 ; v1@54575.85,51959.96 54634,51950 ; v1@54578.39,51930.29 54634,51950 ; v1@54578.39,51969.71 54634,51950
  BottomLayer w20: pad.0@54180.01,50799.26 R1.1@54186.7,50889.49 ; pad.0@54180.12,50802.22 54200,50890 pad.0@54219.88,50802.22 ; pad.0@54180.66,50805.11 R1.1@54213.3,50889.49 ; R1.1@54185.06,50898.68 54200,50815 R1.1@54214.94,50898.68 ; R1.1@54200,50900 pad.0@54200,50800 ; pad.0@54219.34,50805.11 R1.1@54186.7,50889.49 ; pad.0@54219.99,50799.26 R1.1@54213.3,50889.49 ; D10.1@55184.21,51902.56 55200,51950 ; D10.1@55200,51900 55200,51950 ; D10.1@55215.79,51902.56 55200,51950 ; C6.1@55284.21,52097.44 55300,52050 ; C6.1@55304,52100 55390,52100 ; C6.1@55305.49,52084.07 55390,52100 ; C6.1@55305.49,52115.93 55390,52100 ; C6.1@55315.79,52097.44 55300,52050 ; C9.2@55448.68,52085.06 55365,52100 C9.2@55448.68,52114.94 ; C9.2@55450,52100 C6.1@55300,52100 55300,52050 ; R1.1@54186.7,50889.49 pad.0@54200,50800 ; pad.0@54200,50800 R1.1@54213.3,50889.49 ; 55200,51950 55250,52000 55300,52050
  BottomLayer w30: C5.1@51950,50200 C10.2@52100,50200 pad.9@52200,50300 ; C10.2@52106.36,50206.36 pad.9@52200,50300 ; J1.18@52300,50300 pad.9@52200,50300
  BottomLayer w50: J1.18@52300,50300 U1.18@52400,50300 ; pad.0@52900,52000 pad.7@52900,53000 pad.0@53200,53000 ; pad.5@53000,53000 pad.0@53180,53000 ; pad.5@53020,53000 pad.0@53200,53000 ; U2.2@53325,53050 53250,53050 ; pad.32@53500,50800 C12.2@53500,51850 ; pad.0@53200,53000 U2.2@53300,53050 ; pad.0@53200,53000 53250,53050 ; 53250,53050 U2.2@53300,53050 ; 53250,53050 U2.2@53300,53050
VCCU: C1.2 C2.1 D1.1 D2.1 D9.1 J4.1 Kp1.1 L1.2 U3.16 | length 4395.7
  TopLayer w10: D9.1@54629.37,50178.94 54650,50231 ; D9.1@54639.05,50176.08 54650,50231 ; D9.1@54650,50175 54650,50250 54700,50300 J4.1@54700,50600 ; D9.1@54660.95,50176.08 54650,50231 ; D9.1@54670.63,50178.94 54650,50231 ; J4.1@54675.55,50589.79 54700,50535 ; J4.1@54685.12,50593.12 54700,50535 ; J4.1@54700,50595 54700,50535 ; J4.1@54714.88,50593.12 54700,50535 ; J4.1@54724.45,50589.79 54700,50535
  TopLayer w20: C2.1@54409.07,50351.49 54425,50436 C2.1@54440.93,50351.49 ; C1.2@54410.06,50548.68 54425,50465 C1.2@54439.94,50548.68 ; C2.1@54425,50350 C1.2@54425,50550
  TopLayer w50: J4.1@54700,50595 54700,50550 J4.1@54700,50600 54700,50700 ; J4.1@54700,50605 54700,50700 ; 55200,50725 54725,50725 54700,50700 ; L1.2@55200,50750 55286.49,50750 55325,50788.51 Kp1.1@55325,50900
  BottomLayer w20: C1.2@54410.17,50552.25 54425,50600 ; 54425,50525 54425,50600 ; C1.2@54425,50550 54425,50600 ; C1.2@54439.83,50552.25 54425,50600
  BottomLayer w50: D2.1@53550,50675 D1.1@53750,50675 53900,50675 53925,50650 v2(53925,50600) ; 54105.65,50625 v2(53925,50600) ; 54512.64,50625 J4.1@54700,50605 ; J4.1@54700,50625 54425,50625 53925,50625 v2(53925,50600)
pads on no net: J3.5 J3.6 J10.5 J10.6 Kp1.3 Kp1.4 Kp1.5 Kp1.6 U2.17 U3.9 U3.10 U3.11 U3.12 U3.13 U3.14 U3.15 U101.1 U101.2 U101.13 U101.15 U102.1 U102.15

## Polygon pours and split planes (outlines as drawn)
VCC on TopLayer "VCC" (solid, pour order 1000): 52475,50000 52925,50000 52925,52050 52475,52050

## Keep-outs
KeepOutLayer:
  the board outline again, w2

## Other copper
TopLayer:
  text "mpll3" at 55425,52375 h40
  text "oooooooooo" at 52025,49800 h40
  text "1234567890" at 52025,49700 h40
  text "oooooooooo" at 52025,49625 h40

## Silkscreen, mask and mechanical layers (free items; w line width, h text height)
TopOverlay:
  lines w5: 53571.67,51855 53720,51855 ; 53575,51965 53725,51965 ; 54105,50925 54125,50945 54350,50945 ; 54285,51450 54375,51450 54400,51425 ; 54875,51300 55025,51300
  lines w10: 54425,50975 54450,50950 54475,50950
  text "VCO-out" at 53575,51975 h40
  text "comp-in" at 53575,51875 h40
  text "SCM-P" at 55350,51800 h40
  text "F-out" at 54285,51465 h40
  text "DMD-out" at 54825,51225 h40
  text "gnd" at 53225,50950 h40
  text "DMD-out1" at 54050,50950 h40
  text "V-in" at 54500,50925 h40
  text "scm-rxd" at 53725,50750 h40
  text "5V 3.3V GND" at 54650,50750 h40
  text "scm-txd" at 53375,50725 h40
  text "USB-P" at 54500,50025 h40
  text "gnd" at 53475,49975 h40
  text "gnd" at 54150,49975 h40
  text "2017-02-12" at 52025,49850 h40